# Altium PCB DS157-1.0-C心率传感器.PcbDoc
Units mm, origin at the board's own origin, x right, y up, seen from the top; angles counter-clockwise.
Board outline 10 x 14 mm, 2 copper layers (Top Layer, Bottom Layer); 8 components, 5 nets, 30 pads, 6 vias.
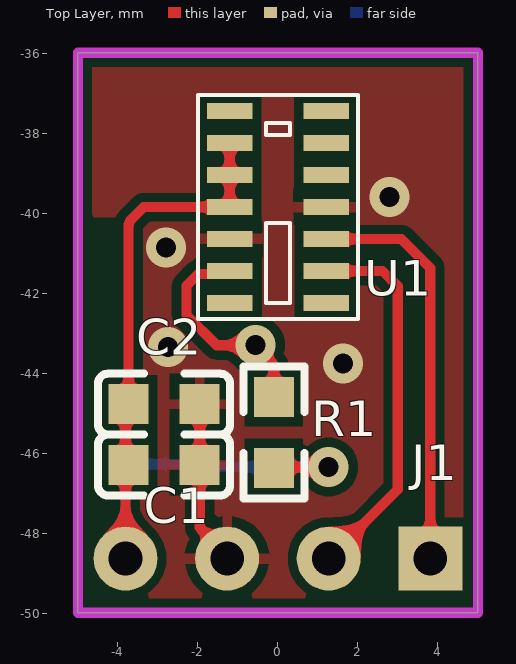
[diagram p0: Top Layer view]
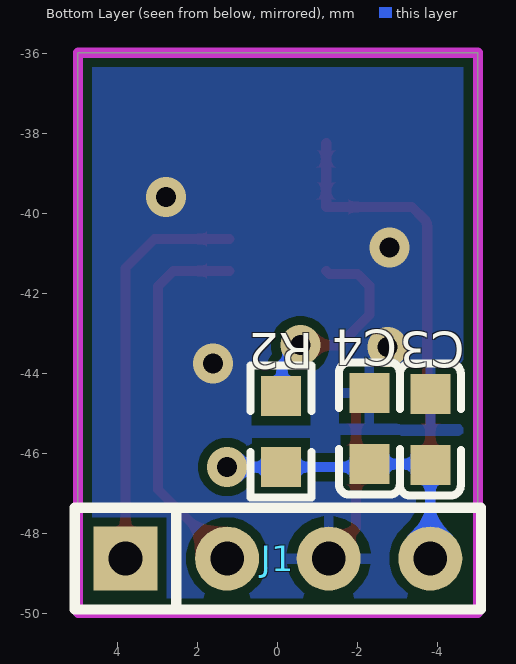
[diagram p1: Bottom Layer view, seen from below]

## Layer stack, top to bottom
Top Solder: solder mask 0.0102, Solder Resist, Dk 3.5
Top Layer: signal copper 0.0356
Dielectric 1: dielectric 0.32, FR-4, Dk 4.8
Bottom Layer: signal copper 0.0356
Bottom Solder: solder mask 0.0102, Solder Resist, Dk 3.5

## Board outline
-5,-49.97 5,-49.97 5,-35.97 -5,-35.97

## Design rules (kind name [scope] priority, off if disabled: settings)
Clearance [All] p1: gap=0.152 ignorepadtopadclearanceinfootprint=TRUE except(0.229: Arc-Fill Arc-Poly Arc-Region Track-Fill Track-Poly Track-Region SMDPad-Fill SMDPad-Poly SMDPad-Region THPad-Fill THPad-Poly THPad-Region Via-Fill Via-Poly Via-Region Fill-Fill Fill-Poly Fill-Region Poly-Poly Poly-Region Region-Region)
PolygonConnect [All] p1: thpad.connectstyle=Relief thpad.reliefconductorwidth=0.254 thpad.reliefentries=4 thpad.polygonreliefangle="90 Angle" thpad.airgapwidth=0.254 smdpad.connectstyle=Relief smdpad.reliefconductorwidth=0.254 smdpad.reliefentries=4 smdpad.polygonreliefangle="90 Angle" smdpad.airgapwidth=0.254 via.connectstyle=Direct via.reliefconductorwidth=0.254 via.reliefentries=4 via.polygonreliefangle="90 Angle" via.airgapwidth=0.254
RoutingVias [All] p1: holewidth=0.406 width=0.813 viastyle="Through Hole" minholewidth=0.406 minwidth=0.813 maxholewidth=0.711 maxwidth=1.27
SolderMaskExpansion [All] p1: expansion=0.102 istentingtop=FALSE
Width [All] p1: maxlimit=0.508 minlimit=0.152 preferedwidth=0.254
30 further rules are at their usual default settings.

## Components (designator, comment, footprint, x,y, rotation, side; value= is the part's Value field where it differs from the comment)
C1 "SMDCAP00016" 0603CAP -2.845,-46.279 r0 top value=10uF
C2 "SMDCAP00013" 0603CAP -2.845,-44.755 r0 top value=100nF
C3 "SMDCAP00016" 0603CAP -3.81,-45.389 r270 bottom value=10uF
C4 "SMDCAP00013" 0603CAP -2.286,-45.364 r270 bottom value=100nF
J1 "SL000000047" SIP4 0,-48.616 r180 bottom value=4P
R1 "SMDRES00047" 0603RES -0.102,-45.466 r270 top value=4.7K (schematic designator R3)
R2 "SMDRES00047" 0603RES -0.076,-45.441 r270 bottom value=4.7K
U1 "MAX30102" OESIP-14 0,-39.827 r180 top locked

## Footprints (in the part's own frame and the unit in brackets; to place one, negate y for a bottom-side part, rotate by r counter-clockwise, add the part's x,y. Pads: shape width x height; smd on the part's side, far side on the other; paste and mask are expansions set on the pad)
0603CAP [mm]
  rect 1x1 smd: 1(-0.889,0) 2(0.89,0)
  silkscreen extent -1.65,-0.76 1.65,0.76, body extent -0.8,-0.4 0.8,0.4, height 0.3
0603RES [mm]
  rect 1x1 smd: 1(-0.889,0) 2(0.889,0)
  silkscreen extent -1.65,-0.76 1.65,0.76, body extent -0.8,-0.41 0.8,0.41, height 0.51
OESIP-14 [mil]
  rect 45x16 smd: 1(-47.5,94.49) 2(-47.5,62.99) 3(-47.5,31.5) 4(-47.5,0) 5(-47.5,-31.5) 6(-47.5,-62.99) 7(-47.5,-94.49) 8(47.5,-94.49) 9(47.5,-62.99) 10(47.5,-31.5) 11(47.5,0) 12(47.5,31.5) 13(47.5,62.99) 14(47.5,94.49)
  silkscreen extent -79,-110 78,110
SIP4 [mm]
  rect 1.6x1.6 hole 0.843: 1(-3.81,0)
  round 1.6 hole 0.843: 2(-1.27,0) 3(1.27,0) 4(3.81,0)
  silkscreen extent -5.08,-1.27 5.08,1.27, body extent -5.08,-1.27 5.08,1.27, height 8.64

## Part data
C1 C3: library part "MLCC 10uF 50V ±10％ 0603", "贴片电容"
C2 C4: library part "MLCC 100nF 50V ±10％ 0603", "贴片电容"
J1: library part "DIP4 单排母座 间距2.54mm 铜", "单排母座"
R1 R2: library part "Chip 4.7K 1/16W ±1％ 0603", "贴片电阻"

## Via types
v1: diameter 1, hole 0.5, Top Layer to Bottom Layer, tented both sides, 6 vias

## Nets (pads, with @x,y where several pads share a name; then routed paths per layer and width w, separated by ;. In a path a pad name is that pad's centre, name@x,y a point inside that pad or via, vN(x,y) a via of type N, cw(c..) or ccw(c..) an arc to the next point about the centre after c; other vN are vias at no path point)
GND: C1.2 C2.2 C3.1 C4.1 J1.3 U1.4 U1.12 | length 4
  Top Layer w0.254: C2.2@-1.955,-44.856 -1.955,-46.38 -1.955,-47.841 -1.27,-48.525 J1.3
  other v1: 1.626,-43.739 -2.743,-43.332 -2.794,-40.843 2.794,-39.573
I2C1_SCL: J1.2 U1.2 | length 9.5
  Top Layer w0.254: U1.2 2.616,-41.427 2.997,-41.808 2.997,-46.888 J1.2
I2C1_SDA: J1.1 U1.3 | length 10.2
  Top Layer w0.254: U1.3 3.086,-40.627 3.81,-41.351 J1.1
NetR1_1: R1.1 R2.1 U1.13 | length 7
  Top Layer w0.254: U1.13 -1.283,-41.503 -1.8,-41.503 -1.993,-41.504 -2.286,-41.796 -2.286,-42.526 -1.53,-43.282 v1(-0.559,-43.282) -0.559,-43.318 -0.102,-43.775 R1.1
  Bottom Layer w0.254: v1(-0.559,-43.282) -0.559,-43.318 -0.102,-43.775 -0.102,-44.577 R2.1
VCC_3V3_MCU: C1.1 C2.1 C3.2 C4.2 J1.4 R1.2 R2.2 U1.9 U1.10 U1.11 | length 21.2
  Top Layer w0.254: J1.4 -3.81,-46.279 -3.81,-44.933 C2.1@-3.734,-44.856 ; C2.1 -3.734,-40.313 cw(c-3.48,-40.313) -3.659,-40.134 -3.353,-39.827 U1.11 U1.10 U1.9 ; R1.2 -0.076,-46.33 v1(1.27,-46.33)
  Bottom Layer w0.254: J1.4 C3.2@-3.81,-46.407 ; C3.2 -3.786,-46.254 C4.2 ; C4.2@-2.229,-46.33 v1(1.27,-46.33)
pads on no net: U1.1 U1.5 U1.6 U1.7 U1.8 U1.14

## Polygon pours and split planes (outlines as drawn)
GND on Bottom Layer "GND_L02_P000" (solid, remove dead copper, pour order 0): 5,-49.886 -5,-49.886 -5,-35.97 5,-35.97
GND on Top Layer "GND_L01_P001" (solid, remove dead copper, pour order 1): 5,-49.841 -5,-49.841 -5,-35.925 5,-35.925

## Keep-outs
Keep-Out Layer:
  the board outline again, w0.254

## Other copper
Top Layer:
  pour cut-out: -4.173,-47.648 -4.477,-47.648 -4.623,-47.794 -4.623,-40.081 -4.081,-40.081 -4.069,-40.069

## Silkscreen, mask and mechanical layers (free items; w line width, h text height)
Mechanical 1:
  lines w0.254: -5,-49.97 5,-49.97 ; -5,-49.97 -5,-35.97 ; -5,-49.97 5,-49.97 ; -5,-49.97 -5,-35.97 ; -5,-35.97 5,-35.97 ; -5,-35.97 5,-35.97 ; 5,-49.97 5,-35.97 ; 5,-49.97 5,-35.97